# EAGLE board mini_optron (EAGLE 9.6.1)
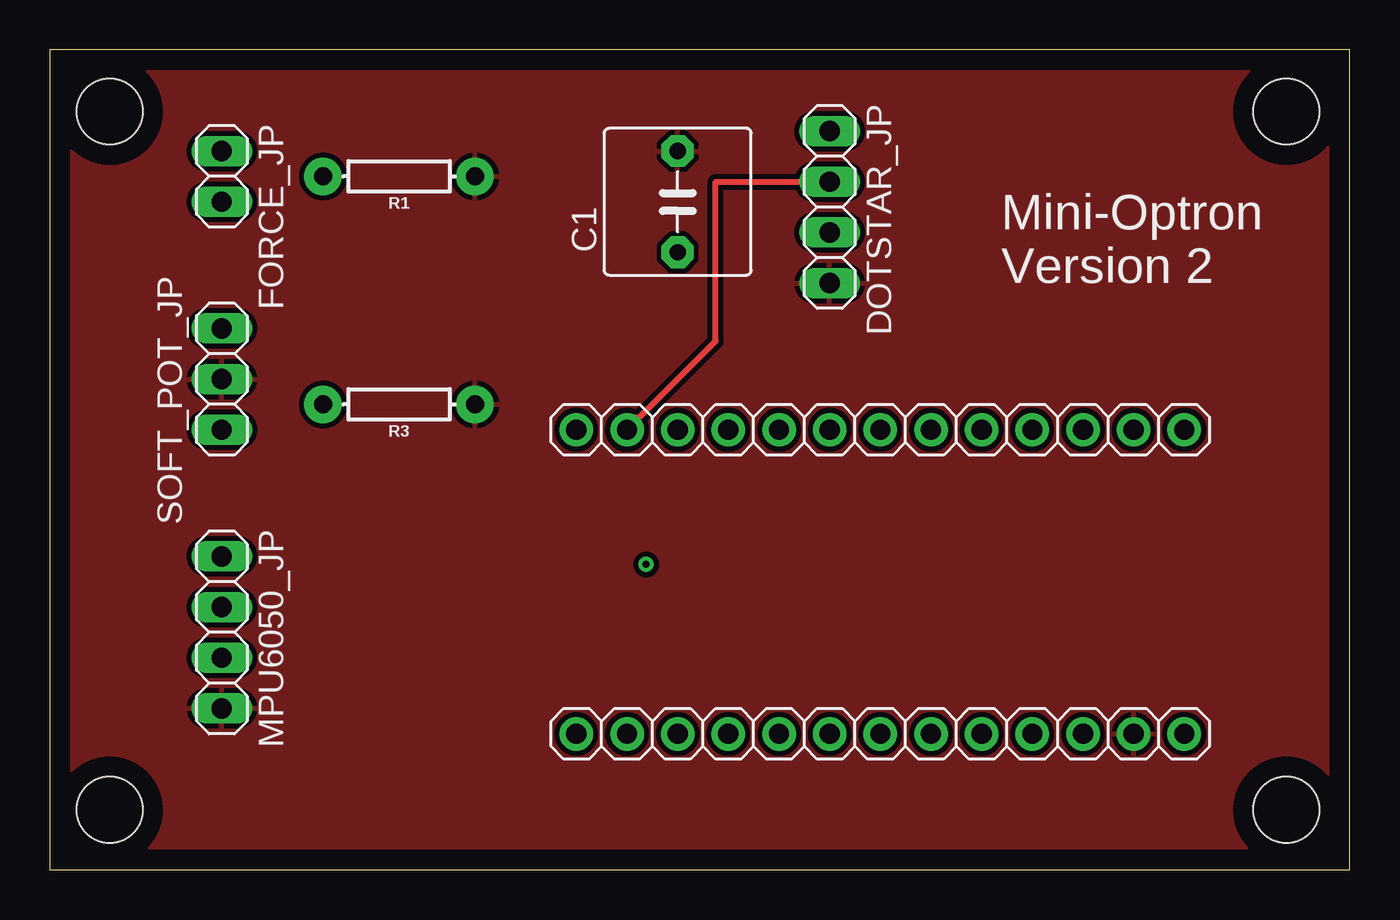
[diagram p0: board, top side]
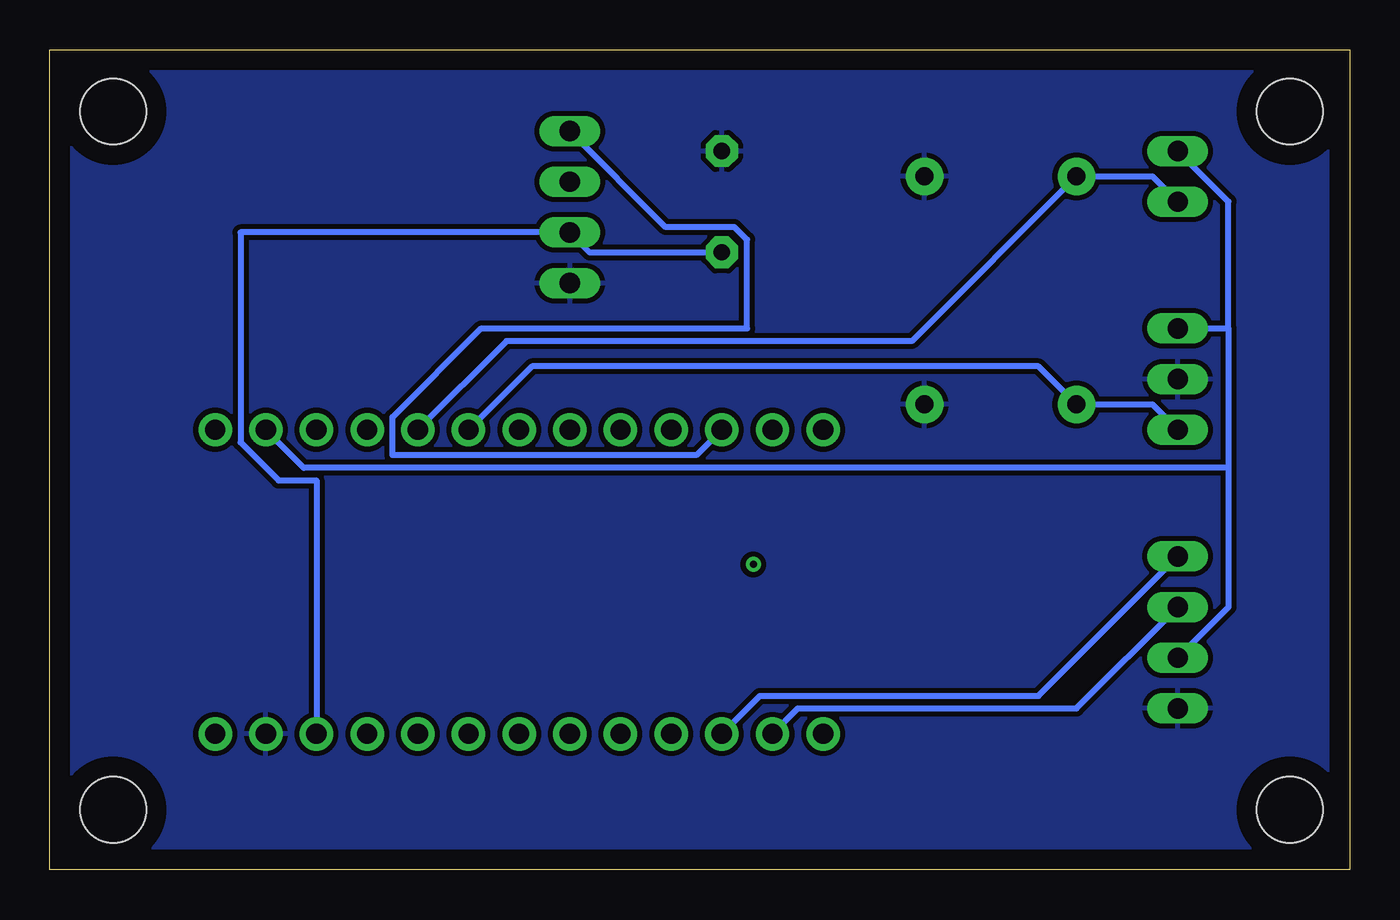
[diagram p1: board, bottom side, seen from below]

Size 65.17 x 41.09 mm. Coordinates in mm from the lower left corner, seen from the top.
Outline: 0,0 65.17,0 65.17,41.09 0,41.09 0,0
Copper layers (1*16): Top 0.035mm / dielectric 1.5mm / Bottom 0.035mm
Design rules "default": minimum track width 6mil, minimum drill 0.35mm, track to track 6mil, track to pad 6mil, pad to pad 6mil, via to via 6mil, smd to smd 6mil, copper to edge 40mil, drill to drill 6mil, minimum pad ring 10mil, minimum via ring 8mil, stop-mask expansion 4mil, vias tented up to drill 0mil, thermal gap 10mil
Net classes: 0 default: width 0.305 mm, drill 0.508 mm, clearance 0.254 mm
Holes 3.3 mm at 3,3 3,38 62,38 62,3

## Footprints (pad centres in the part's own frame; a part is rotated, then mirrored left to right if it is on the bottom)
C5B7.2 = drill 0.813 pad 1.6 octagon: 1 -2.54,0; 2 2.54,0
1X04 = drill 1.016 long: 1 -3.81,0; 2 -1.27,0; 3 1.27,0; 4 3.81,0
1X02 = drill 1.016 long: 1 -1.27,0; 2 1.27,0
1X13-BIG = drill 1.016 pad 1.676: 1 -15.24,0; 2 -12.7,0; 3 -10.16,0; 4 -7.62,0; 5 -5.08,0; 6 -2.54,0; 7 0,0; 8 2.54,0; 9 5.08,0; 10 7.62,0; 11 10.16,0; 12 12.7,0; 13 15.24,0
AXIAL-0.3 = drill 0.9 pad 1.88: P$1 -3.81,0; P$2 3.81,0
1X03 = drill 1.016 long: 1 -2.54,0; 2 0,0; 3 2.54,0

## Placement (x,y rotation side)
C1  1 uF  [C5B7.2]  31.48,33.48 90 top
DOTSTAR_JP  [1X04]  39.1,33.21 270 top
FORCE_JP  [1X02]  8.62,34.75 270 top
JP1  [1X13-BIG]  41.64,22.05 180 top
JP2  [1X13-BIG]  41.64,6.81 180 top
MPU6050_JP  [1X04]  8.62,11.89 270 top
R1  10K  [AXIAL-0.3]  17.51,34.75 180 top
R3  10k  [AXIAL-0.3]  17.51,23.32 180 top
SOFT_POT_JP  [1X03]  8.62,24.59 270 top

## Library data of the parts
C1 = capacitor-wima; MF: AVX; MPN: 0805YD105KAT2A; OC_NEWARK: 95W9236
DOTSTAR_JP FORCE_JP MPU6050_JP SOFT_POT_JP = pinhead
JP1 JP2 = adafruit; OC_NEWARK: unknown
R1 R3 = SparkFun-Resistors; MF: VISHAY; MPN: CRCW060310K0FKEA; OC_NEWARK: 52K8063

## Nets
3V: FORCE_JP.1 JP1.2 MPU6050_JP.3 SOFT_POT_JP.1
5V: C1.1 DOTSTAR_JP.3 JP2.3
A0: FORCE_JP.2 JP1.5 R1.P$2
A1: JP1.6 R3.P$2 SOFT_POT_JP.3
GND: C1.2 DOTSTAR_JP.4 JP2.2 MPU6050_JP.4 R1.P$1 R3.P$1 SOFT_POT_JP.2
MOSI: DOTSTAR_JP.2 JP1.12
SCK: DOTSTAR_JP.1 JP1.11
SCL: JP2.11 MPU6050_JP.1
SDA: JP2.12 MPU6050_JP.2

## Tracks (layer width: path | path; a pad name or v marks a point on that pad's centre or on a via)
3V
  Bottom 0.305: MPU6050_JP.3 6.08,13.16 6.08,20.14 | 6.08,27.13 6.08,20.14 | SOFT_POT_JP.1 6.08,27.13 | FORCE_JP.1 6.08,33.48 6.08,27.13 | JP1.2 52.44,20.14 6.08,20.14
5V
  Bottom 0.305: C1.1 38.1,30.94 DOTSTAR_JP.3 55.61,31.94 55.61,21.41 53.7,19.51 51.8,19.51 JP2.3
A0
  Bottom 0.305: FORCE_JP.2 9.89,34.75 R1.P$2 21.95,26.5 42.27,26.5 JP1.5
A1
  Bottom 0.305: SOFT_POT_JP.3 9.89,23.32 R3.P$2 15.61,25.23 41.01,25.23 JP1.6
GND
  pour Top: -1.27,42.37 -1.27,-1.27 66.77,-1.27 66.77,42.37
  pour Bottom: -1.27,42.37 -1.27,-1.27 66.77,-1.27 66.77,42.37
MOSI
  Top 0.305: DOTSTAR_JP.2 33.38,34.48 33.38,26.5 29.57,22.68 28.94,22.68 JP1.12
N$1  (via drill 0.35)
  other vias: 29.9,15.3
SCK
  Bottom 0.305: DOTSTAR_JP.1 34.29,32.21 30.84,32.21 30.21,31.57 30.21,27.13 43.55,27.13 47.99,22.68 47.99,20.78 32.75,20.78 JP1.11
SCL
  Bottom 0.305: MPU6050_JP.1 15.61,8.71 29.57,8.71 JP2.11
SDA
  Bottom 0.305: MPU6050_JP.2 13.7,8.08 27.67,8.08 JP2.12

## Text on the board
tNames: Mini-Optron / Version 2